# Altium PCB PTx-V1.PcbDoc
Units mil, origin at the board's own origin, x right, y up, seen from the top; angles counter-clockwise.
Board outline 6102.36 x 4488.19 mil, 2 copper layers (Top Layer, Bottom Layer); 94 components, 94 nets, 366 pads, 149 vias.
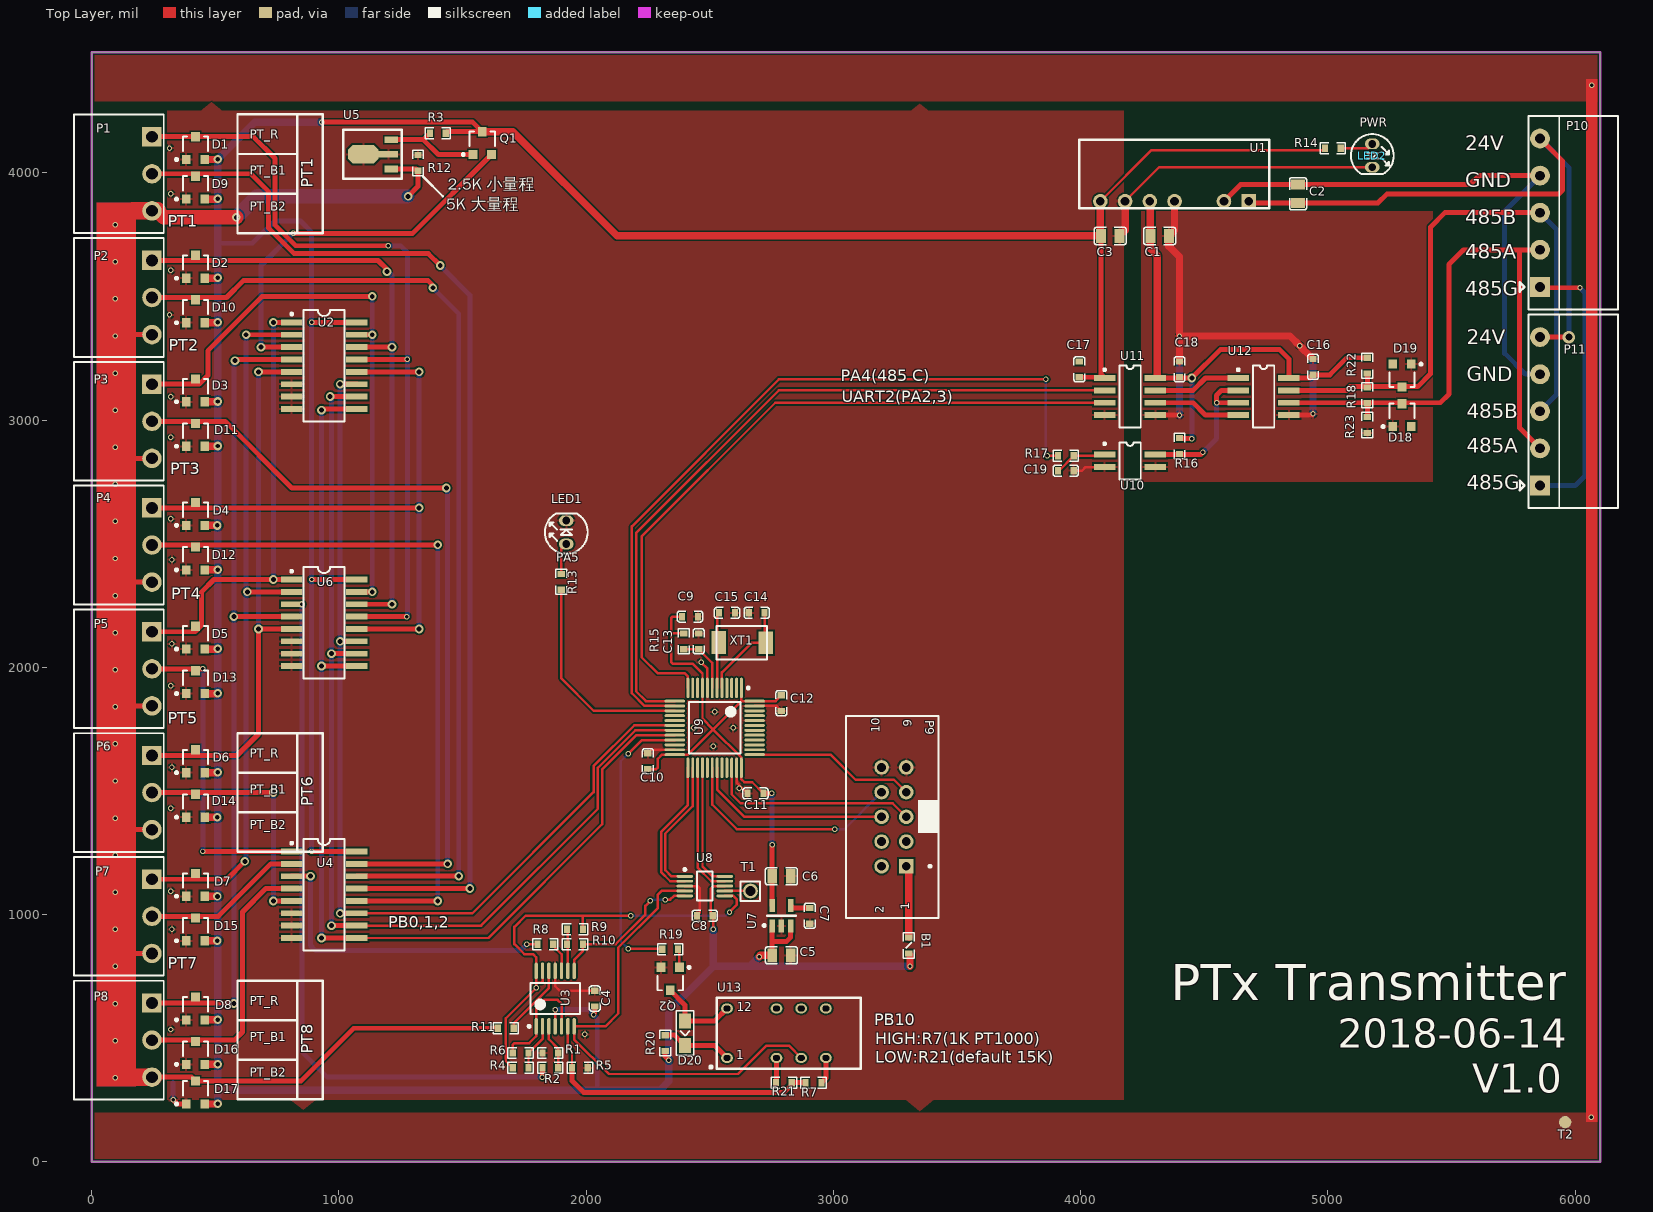
[diagram p0: Top Layer view]
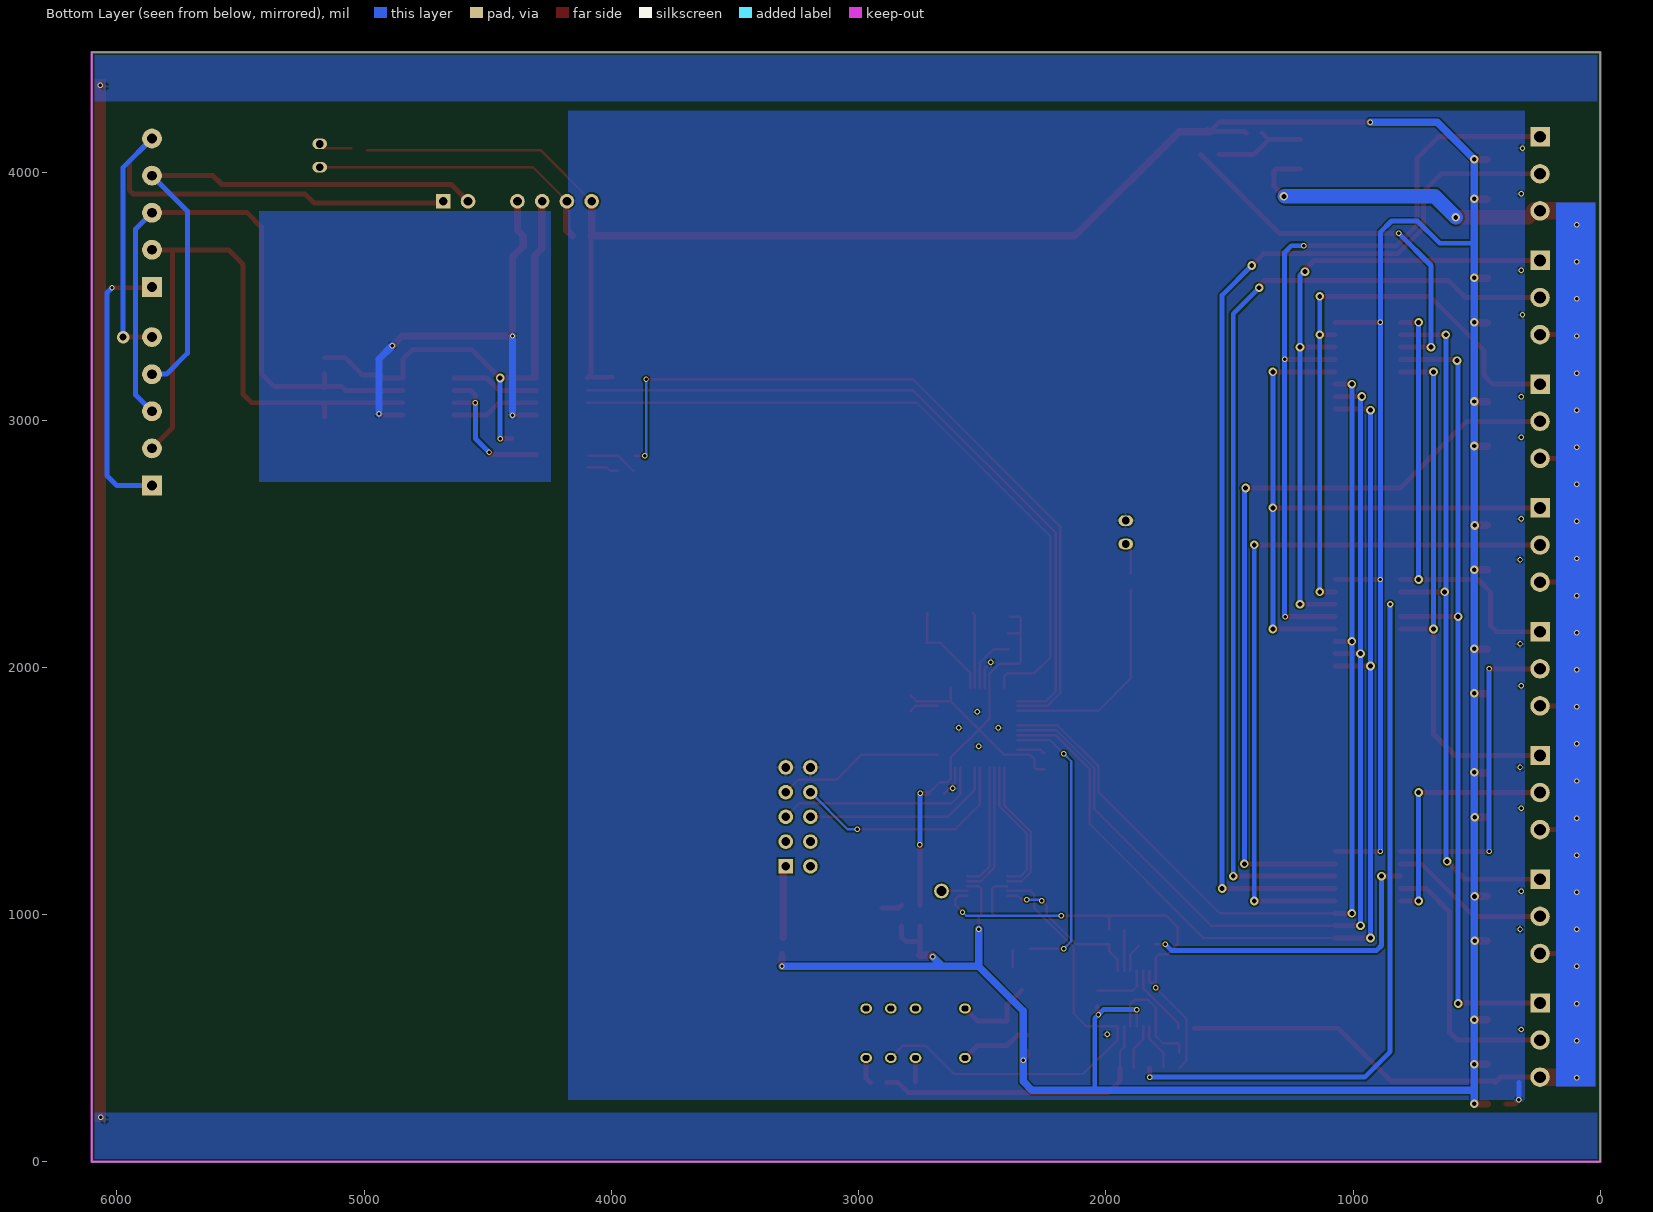
[diagram p1: Bottom Layer view, seen from below]

## Layer stack, top to bottom
Top Layer: signal copper 1.4
Dielectric: dielectric 12.6, FR-4, Dk 4.8
Bottom Layer: signal copper 1.4

## Board outline
0,0 6102.36,0 6102.36,4488.19 0,4488.19

## Design rules (kind name [scope] priority, off if disabled: settings)
Clearance [All] p1: gap=7
ComponentClearance [All] p1: gap=0 collisioncheckmode=3 verticalgap=0 showdistances=FALSE
HoleSize [All] p1: absolutevalues=TRUE maxlimit=1000 minlimit=1 maxpercent=80.000 minpercent=20.000
HoleToHoleClearance [All] p1: gap=7 allowstackedmicrovias=TRUE
MinimumSolderMaskSliver [All] p1: minsoldermaskwidth=0
PolygonConnect [All] p1: connectstyle=Relief reliefconductorwidth=10 reliefentries=4 polygonreliefangle="90 Angle"
RoomDefinition 前端 [InComponentClass('前端')] p1: confinementstyle=ConfineIn formatcopy=TRUE lockcomponents=FALSE outline -3165,-1025 -1165,-1025 -1165,-25 -3165,-25
RoomDefinition mcu [InComponentClass('mcu')] p2: confinementstyle=ConfineIn formatcopy=TRUE lockcomponents=FALSE outline -3165,-1025 -1165,-1025 -1165,-25 -3165,-25
RoutingVias [All] p1: holewidth=14 width=22 viastyle="Through Hole" minholewidth=14 minwidth=22 maxholewidth=280 maxwidth=500
SilkToSilkClearance [All] p1: silktosilkclearance=0
SilkscreenOverComponentPads [All] p1: minsilkscreentomaskgap=0
SolderMaskExpansion [All] p1: expansion=4
TestPointUsage [All] p1: valid=0 allowmultiple=FALSE
Testpoint [All] p1: side=15 testpointundercomponent=TRUE minsize=40 maxsize=100 preferedsize=60 minholesize=0 maxholesize=40 preferedholesize=32 testpointgrid=1 style=1023 order=0-112345678
Width [All] p1: maxlimit=100 minlimit=7 preferedwidth=7
18 further rules are at their usual default settings.

## Classes and differential pairs
component class 前端: C1 C2 C3 C4 D1 D2 D3 D4 D5 D6 D7 D8 D9 D10 D11 D12 D13 D14 D15 D16 D17 D20 P1 P2 P3 P4 P5 P6 P7 P8 P10 P11 Q1 Q2 R1 R2 R3 R4 R5 R6 R7 R8 R9 R10 R11 R12 R19 R20 R21 T2 U1 U2 U3 U4 U5 U6 U13
component class mcu: B1 C5 C6 C7 C8 C9 C10 C11 C12 C13 C14 C15 C16 C17 C18 C19 D4 D5 LED1 LED2 P9 R13 R14 R15 R16 R17 R18 R22 R23 T1 U7 U8 U9 U10 U11 U12 XT1

## Components (designator, comment, footprint, x,y, rotation, side; value= is the part's Value field where it differs from the comment)
B1 "BEAD" 0603L 3305,875 r270 top
C1 "4.7uF/16V" 0805C 4320,3745 r180 top
C2 "2.2uF/50V" 0805C 4880,3915 r90 top
C3 "4.7uF/16V" 0805C 4120,3745 r180 top
C4 "1uF" 0603C 2035,660 r270 top
C5 "1uF" 0805C 2790,835 r180 top
C6 "1uF" 0805C 2790,1155 r180 top
C7 "470P" 0603C 2905,995 r270 top
C8 "104" 0603C 2480,995 r0 top
C9 "104" 0603C 2420,2205 r180 top
C10 "104" 0603C 2250,1620 r270 top
C11 "104" 0603C 2685,1490 r180 top
C12 "104" 0603C 2790,1855 r90 top
C13 "104" 0603C 2455,2105 r90 top
C14 "22P" 0603C 2690,2220 r180 top
C15 "22P" 0603C 2570,2220 r0 top
C16 "104" 0603C 4940,3215 r270 top
C17 "104" 0603C 3995,3205 r90 top
C18 "104" 0603C 4400,3205 r270 top
C19 "104" 0603C 3940,2795 r0 top
D1 "PESD5V0L2BT" SOT23A 420,4100 r0 top
D2 "PESD5V0L2BT" SOT23A 420,3620 r0 top
D3 "PESD5V0L2BT" SOT23A 420,3120 r0 top
D4 "PESD5V0L2BT" SOT23A 420,2620 r0 top
D5 "PESD5V0L2BT" SOT23A 420,2120 r0 top
D6 "PESD5V0L2BT" SOT23A 420,1620 r0 top
D7 "PESD5V0L2BT" SOT23A 420,1120 r0 top
D8 "PESD5V0L2BT" SOT23A 420,620 r0 top
D9 "PESD5V0L2BT" SOT23A 420,3940 r0 top
D10 "PESD5V0L2BT" SOT23A 420,3440 r0 top
D11 "PESD5V0L2BT" SOT23A 420,2940 r0 top
D12 "PESD5V0L2BT" SOT23A 420,2440 r0 top
D13 "PESD5V0L2BT" SOT23A 420,1940 r0 top
D14 "PESD5V0L2BT" SOT23A 420,1440 r0 top
D15 "PESD5V0L2BT" SOT23A 420,940 r0 top
D16 "PESD5V0L2BT" SOT23A 420,440 r0 top
D17 "PESD5V0L2BT" SOT23A 420,280 r0 top
D18 "PESD5V0L2BT" SOT23A 5300,3020 r0 top
D19 "PESD5V0L2BT" SOT23A 5300,3180 r180 top
D20 "D-S" SOD123 2400,520 r270 top
LED1 "LED" LED-3 1920,2545.76 r90 top
LED2 "LED" LED-3 5180,4070 r270 top
P1 "Header 3" KF2DEG-3.81-3 244.09,3996.06 r270 top locked
P2 "Header 3" KF2DEG-3.81-3 244.09,3495.5 r270 top locked
P3 "Header 3" KF2DEG-3.81-3 244.09,2994.94 r270 top locked
P4 "Header 3" KF2DEG-3.81-3 244.09,2494.38 r270 top locked
P5 "Header 3" KF2DEG-3.81-3 244.09,1993.81 r270 top locked
P6 "Header 3" KF2DEG-3.81-3 244.09,1493.25 r270 top locked
P7 "Header 3" KF2DEG-3.81-3 244.09,992.69 r270 top locked
P8 "Header 3" KF2DEG-3.81-3 244.09,492.13 r270 top locked
P9 "Header 5X2" DC2.54-10 3245,1395 r90 top
P10 "Header 5" KF2DEG-3.81-5 5858.27,3838.58 r90 top locked
P11 "Header 5" KF2DEG-3.81-5 5858.27,3035.43 r90 top locked
Q1 "S9014" SOT23A 1580,4120 r0 top
Q2 "S9014" SOT23A 2340,740 r180 top
R1 "10K" 0603R 1855,440 r0 top
R2 "10K" 0603R 1855,380 r180 top
R3 "1K" 0603R 1400,4160 r0 top
R4 "10K" 0603R 1735,380 r180 top
R5 "1K" 0603R 1975,380 r0 top
R6 "10K" 0603R 1735,440 r0 top
R7 "1K" 0603R 2920,320 r0 top
R8 "1K" 0603R 1835,880 r180 top
R9 "1K" 0603R 1955,940 r0 top
R10 "100K" 0603R 1955,880 r180 top
R11 "10K" 0603R 1675,540 r180 top
R12 "2.5K" 0603R 1320,4040 r270 top
R13 "1.5K" 0603R 1900,2345.76 r90 top
R14 "1.5K" 0603R 5020,4100 r0 top
R15 "10K" 0603R 2395,2105 r270 top
R16 "RES" 0603R 4400,2895 r90 top
R17 "RES" 0603R 3940,2855 r180 top
R18 "120R" 0603R 5160,3100 r90 top
R19 "10K" 0603R 2340,860 r0 top
R20 "100R" 0603R 2320,480 r270 top
R21 "15K" 0603R 2800,320 r180 top
R22 "10K" 0603R 5160,3220 r90 top
R23 "10K" 0603R 5160,2980 r90 top
T1 "TP" TESTP 2665,1095 r0 top
T2 "TP" TP1 5960,160 r0 top
U1 "D240505S" D240505S-2W 4680,3885 r180 top
U2 "CD4051" SOP16 940,3220 r270 top
U3 "OPA4330AIPWR" TSSOP14-65 1875,660 r90 top locked
U4 "CD4051" SOP16 940,1080 r270 top
U5 "TL431" SOT-89 1160,4075 r90 top
U6 "CD4051" SOP16 940,2180 r270 top
U7 "MIC5219" SOT23-5 2790,995 r90 top
U8 "ADS1118" TSSOP10 2480,1115 r0 top
U9 "STM32F103" LQFP48 2520,1755 r270 top
U10 "TLP281" SOP4 4200,2835 r270 top
U11 "ADUM3201" SOP8 4200,3095 r270 top
U12 "BL3085B" SOP8 4740,3095 r270 top
U13 "JDQ(G6S-2)" JDQ-G6S-2 2820,520 r0 top
XT1 "8M" 5032 2630,2100 r180 top

## Footprints (in the part's own frame and the unit in brackets; to place one, negate y for a bottom-side part, rotate by r counter-clockwise, add the part's x,y. Pads: shape width x height; smd on the part's side, far side on the other; paste and mask are expansions set on the pad)
0603C [mil]
  rect 25x30 smd: 1(-32,0) 2(32,0)
  silkscreen extent -51,-22 51,22
0603L [mil]
  rect 25x30 smd: 1(-32,0) 2(32,0)
  silkscreen extent -51,-22 51,22
0603R [mil]
  rect 25x30 smd: 1(-32,0) 2(32,0)
  silkscreen extent -51,-22 51,22
0805C [mm]
  rect 1x1.45 smd: 1(-0.95,0) 2(0.95,0)
  silkscreen extent -1.64,-0.86 1.64,0.89
5032 [mm]
  rect 1.5x2.3 smd: 1(-2.438,0.025)
  rect 1.5x2.4 smd: 2(2.388,0)
  silkscreen extent -2.59,-1.7 2.59,1.75
D240505S-2W [mm] "24V转5Vdcdc模块"
  rect 1.5x1.5 hole 0.9: 1(0,0)
  round 1.5 hole 0.9: 2(2.54,0) 4(7.62,0) 5(10.16,0) 6(12.7,0) 7(15.24,0)
  silkscreen extent -2.09,-6.3 17.41,0.7
DC2.54-10 [mm] "Connector; IDC, PCB Transition - 2 Rows, Thru-Hole; 10 Position; Vertical; Pitch 2.54 mm; Body 18.00 x 6.1 x 7.45 mm (LxWxH)"
  rect 1.5x1.5 hole 0.9: 1(-5.08,-1.27)
  round 1.5 hole 0.9: 2(-5.08,1.27) 3(-2.54,-1.27) 4(-2.54,1.27) 5(0,-1.27) 6(0,1.27) 7(2.54,-1.27) 8(2.54,1.27) 9(5.08,-1.27) 10(5.08,1.27)
  silkscreen extent -10.39,-4.57 10.36,4.93
JDQ-G6S-2 [mm] "继电器（G6S-2） 5VDC"
  oval 1.2x1 hole 0.6 slot 0.7 at 0 deg: 1(-6.35,-2.54) 3(-1.27,-2.54) 4(1.27,-2.54) 5(3.81,-2.54) 8(3.81,2.54) 9(1.27,2.54) 10(-1.27,2.54) 12(-6.35,2.54)
  silkscreen extent -8.14,-3.65 7.4,3.65
KF2DEG-3.81-3 [mm]
  rect 2x2 hole 1.2: 1(-3.81,0)
  round 2 hole 1.2: 2(0,0) 3(3.81,0)
  silkscreen extent -6.1,-8 6.1,1.2
KF2DEG-3.81-5 [mil]
  rect 80x80 hole 39.37: 1(-300,0)
  round 80 hole 39.37: 2(-150,0) 3(0,0) 4(150,0) 5(300,0)
  silkscreen extent -391,-315 391,83
LED-3 [mm]
  oval 1.1x1.5 hole 0.8: A(-1.194,0) K(1.206,0)
  silkscreen extent -2.19,-2.2 1.92,2.2
LQFP48 [mm]
  oval 2.1x0.3 smd: 1(-4.1,2.75) 2(-4.1,2.25) 3(-4.1,1.75) 4(-4.1,1.25) 5(-4.1,0.75) 6(-4.1,0.25) 7(-4.1,-0.25) 8(-4.1,-0.75) 9(-4.1,-1.25) 10(-4.1,-1.75) 11(-4.1,-2.25) 12(-4.1,-2.75) 25(4.1,-2.75) 26(4.1,-2.25) 27(4.1,-1.75) 28(4.1,-1.25) 29(4.1,-0.75) 30(4.1,-0.25) 31(4.1,0.25) 32(4.1,0.75) 33(4.1,1.25) 34(4.1,1.75) 35(4.1,2.25) 36(4.1,2.75)
  oval 0.3x2.1 smd: 13(-2.75,-4.1) 14(-2.25,-4.1) 15(-1.75,-4.1) 16(-1.25,-4.1) 17(-0.75,-4.1) 18(-0.25,-4.1) 19(0.25,-4.1) 20(0.75,-4.1) 21(1.25,-4.1) 22(1.75,-4.1) 23(2.25,-4.1) 24(2.75,-4.1) 37(2.75,4.1) 38(2.25,4.1) 39(1.75,4.1) 40(1.25,4.1) 41(0.75,4.1) 42(0.25,4.1) 43(-0.25,4.1) 44(-0.75,4.1) 45(-1.25,4.1) 46(-1.75,4.1) 47(-2.25,4.1) 48(-2.75,4.1)
  silkscreen extent -4.22,-2.65 2.65,3.57
SOD123 [mil]
  rect 60x49.21 smd: A(-50,0) K(50,0)
  silkscreen extent -90,-35 90,35
SOP4 [mm] "Small Outline; 6 Leads; Body Width 4.3 mm; Pitch 1.27 mm"
  rect 0.6x2.2 smd: 1(-0.635,-2.6) 2(0.635,-2.6) 3(0.635,2.6) 4(-0.635,2.6)
  silkscreen extent -1.91,-2.72 1.91,1.1
SOP8 [mm] "Small Outline; 8 Leads; Body Width 4.3 mm; Pitch 1.27 mm"
  rect 0.6x2.2 smd: 1(-1.905,-2.6) 2(-0.635,-2.6) 3(0.635,-2.6) 4(1.905,-2.6) 5(1.905,2.6) 6(0.635,2.6) 7(-0.635,2.6) 8(-1.905,2.6)
  silkscreen extent -3.18,-2.72 3.18,1.1
SOP16 [mm] "Small Outline; 16 Leads; Body Width 5.6 mm; Pitch 1.27 mm"
  rect 0.6x2.2 smd: 1(-4.445,-3.321) 2(-3.175,-3.321) 3(-1.905,-3.321) 4(-0.635,-3.321) 5(0.635,-3.321) 6(1.905,-3.321) 7(3.175,-3.321) 8(4.445,-3.321) 9(4.445,3.371) 10(3.175,3.371) 11(1.905,3.371) 12(0.635,3.371) 13(-0.635,3.371) 14(-1.905,3.371) 15(-3.175,3.371) 16(-4.445,3.371)
  silkscreen extent -5.73,-3.45 5.73,2.1
SOT23-5 [mm] "SOT23, 5-Leads, Body 3.0x2.6mm (max), Pitch 0.95mm, IPC Medium Density"
  rect 1.3x0.55 smd: 1(-1.051,0.95) 2(-1.051,0) 3(-1.051,-0.95) 4(1.051,-0.95) 5(1.051,0.95)
  silkscreen extent -1.12,-1.5 0.05,1.9
SOT23A [mm] "SOT-23; 3 Leads; Body 3.0 x 2.5 mm, inc. leads (LxW max)"
  rect 0.9x0.95 smd: 1(-0.95,-1.175) 2(0.95,-1.175) 3(0,1.175)
  silkscreen extent -2.07,-1.3 1.3,1.18
SOT-89 [mm] "SOT23, 5-Leads, Body 3.0x2.6mm (max), Pitch 0.95mm, IPC Medium Density"
  rect 0.7x1.35 smd: 1(-1.501,-1.321) 3(1.499,-1.321)
  oct 1.9x3.15 smd: 2(-0.001,1.544)
  rect 0.7x1.99 smd: 2(-0.001,-1.026)
  silkscreen extent -2.5,-2.39 2.5,3.61
TESTP [mil]
  round 60 hole 40: 1(0,0)
  silkscreen extent -40,-39 39,39
TP1 [mil]
  round 50 smd: 1(0,0)
TSSOP10 [mm] "TSSOP, 10-Leads, Body 3.0x3.0mm (max), Pitch 0.50mm, IPC Medium Density"
  oval 1.7x0.3 smd: 1(-2.05,1) 2(-2.05,0.5) 3(-2.05,0) 4(-2.05,-0.5) 5(-2.05,-1) 6(2.05,-1) 7(2.05,-0.5) 8(2.05,0) 9(2.05,0.5) 10(2.05,1)
  silkscreen extent -2.17,-1.5 0.8,1.82
TSSOP14-65 [mm] "TSOP, 14-Leads, Body 5.1x4.5mm (max), Pitch 0.65mm, IPC Medium Density"
  oval 1.7x0.35 smd: 1(-2.85,1.95) 2(-2.85,1.3) 3(-2.85,0.65) 4(-2.85,0) 5(-2.85,-0.65) 6(-2.85,-1.3) 7(-2.85,-1.95) 8(2.85,-1.95) 9(2.85,-1.3) 10(2.85,-0.65) 11(2.85,0) 12(2.85,0.65) 13(2.85,1.3) 14(2.85,1.95)
  silkscreen extent -2.97,-2.55 1.6,2.8

## Part data
B1: "磁珠"
C1 C2 C3 C4 C5 C6 C7 C8 C9 C10 C11 C12 C13 C14 C15 C16 C17 C18 C19: library part CAP, "普通小电容"
D1 D2 D3 D4 D5 D6 D7 D8 D9 D10 D11 D12 D13 D14 D15 D16 D17 D18 D19: "schottky diod"
D20: "肖特基二极管"
P1 P2 P3 P4 P5 P6 P7 P8: "Header, 3-Pin"
P9: "Header, 5-Pin, Dual row"
P10 P11: "Header, 5-Pin"
Q1 Q2: library part NPN, "NPN三极管"
R1 R2 R3 R4 R5 R6 R7 R8 R9 R10 R11 R12 R13 R14 R15 R18 R19 R20 R21 R22 R23: library part RES, "普通电阻"
R16 R17: "普通电阻"
T1 T2: "testpoint"
U1: library part D240505S-2W, "24V转双5V隔离DCDC"
U2 U4 U6: "模拟多路复用器"
U3: library part OPA4348, "输出轨到轨，4运放"
U8: "16λ ADC"
U10: "TLP281 光耦"
U12: "BL3085B 15KV防静电485"
U13: "继电器（G6S-2 5VDC）"
XT1: library part XT, "晶振"

## Via types
v1: diameter 22, hole 14, Top Layer to Bottom Layer, 87 vias
v2: diameter 35, hole 20, Top Layer to Bottom Layer, 44 vias
v3: diameter 35, hole 18, Top Layer to Bottom Layer, 16 vias
v4: diameter 50, hole 28, Top Layer to Bottom Layer, 1 vias
v5: diameter 25, hole 15, Top Layer to Bottom Layer, 1 vias

## Nets (pads, with @x,y where several pads share a name; then routed paths per layer and width w, separated by ;. In a path a pad name is that pad's centre, name@x,y a point inside that pad or via, vN(x,y) a via of type N, cw(c..) or ccw(c..) an arc to the next point about the centre after c; other vN are vias at no path point)
1GND: C17.2
2D5V: C1.2 C16.2 C18.2 R16.2 R22.2 U1.5 U11.8 U12.8 | length 2041.5
  Top Layer w20: U11.8 v2(4450,3170) 4565,3285 4805,3285 4842.36,3247.64 U12.8 4927,3170 C16.2 5008,3183 5077,3252 R22.2 ; R16.2@4402,2925 v1(4450,2925)
  Top Layer w30: U1.5@4282.6,3882.4 C1.2 4282.6,3692.4 4310,3665 U11.8@4310,3177.64
  Bottom Layer w20: v1(4450,2925) v2(4450,3170)
2GND: C1.1 C16.1 C18.1 D18.1 D19.1 R23.1 U1.4 U10.3 U11.5 U12.5 | length 2069.2
  Top Layer w20: U11.5 v1(4400,3020) ; U12.5 4935,3020 v1(4940,3025)
  Top Layer w30: U1.4 4380,3767.6 C1.1 4357.4,3702.6 4400,3660 v1(4400,3340) ; C18.1 v1(4400,3340) ; C16.1 v1(4886,3301) 4847,3340 v1(4400,3340)
  Bottom Layer w30: v1(4400,3020) v1(4400,3340) ; v1(4886,3301) 4940,3247 v1(4940,3025)
485A: D18.3 P10.2 P11.2 R18.1 R23.2 U12.6 | length 2473.3
  Top Layer w20: U12.6 5455,3070 5490,3105 5490,3630 5548.58,3688.58 5775,3688.58 ; R23.2 R18.1 ; P11.2 5775,2968.7 5775,3688.58 ; P10.2 5775,3688.58
485B: D19.3 P10.3 P11.3 R18.2 R22.1 U12.7 | length 2575.4
  Top Layer w20: U12.7 5075,3120 5090,3135 R18.2@5160,3135 ; R18.2 R18.2@5160,3135 ; R22.1 R18.2@5160,3135 ; P10.3 5473.58,3838.58 5415,3780 5415,3187 5363,3135 R18.2@5160,3135
  Bottom Layer w20: P11.3 5925,3102.17 5925,3771.85 P10.3
485G: P10.1 P11.1 | length 1129.6
  Top Layer w20: P10.1 5861.85,3535 v1(6020,3535)
  Bottom Layer w20: P11.1 6000.43,2735.43 6040,2775 6040,3515 v1(6020,3535)
ADC0: U3.7 U8.4 U13.4 | length 1959
  Top Layer w10: U8.4 2305.31,1095.32 2290.31,1080.32 2290.31,1026.27 2130,865.96 2130,600 2077.8,547.8 U3.7 1951.77,495.23 2092,355 2615,355 2730,470 2820,470 U13.4
ADC1: R10.1 U3.8 U8.5 | length 636.2
  Top Layer w10: U3.8 1951.77,816.77 1987,852 R10.1 2120,880 2240,1000 2240,1035 v1(2260,1055) ; v1(2320,1060) 2340,1060 2355.63,1075.63 U8.5
  Bottom Layer w10: v1(2260,1055) 2265,1060 v1(2320,1060)
D3V3: C6.2 C9.2 C10.2 C11.1 C12.2 R15.1 U7.5 U9.1 U9.9 U9.24 U9.36 U9.48 | length 2247.7
  Top Layer w10: C10.2 2283,1588 2290,1595 2290,1630 2306.73,1646.73 U9.24 ; 2347,2137 R15.1 ; U9.24@2358.77,1646.92 2411.92,1646.92 2513.96,1748.96 ; C9.2 2350,2205 2345,2200 2345,2020 2350,2015 2430,2015 2470.79,1974.21 U9.9 2470.79,1792.13 2513.96,1748.96 ; U9.1 2628.27,1863.27 ; C11.1 2672,1535 2640,1535 2628.27,1546.73 U9.36 2628.27,1634.65 2513.96,1748.96 ; C12.2 2766.27,1863.27 U9.48 2628.27,1863.27 ; 2513.96,1748.96 2628.27,1863.27
  Top Layer w20: C11.1 v1(2750,1490) ; U7.5 C6.2 v1(2752.6,1282.4)
  Bottom Layer w20: v1(2750,1490) 2752.6,1487.4 v1(2752.6,1282.4)
D5V: B1.2 C3.2 C4.2 C5.2 C8.2 C17.1 D1.2 D2.2 D3.2 D4.2 D5.2 D6.2 D7.2 D8.2 D9.2 D10.2 D11.2 D12.2 D13.2 D14.2 D15.2 D16.2 D17.2 Q1.3 R3.2 R14.1 R20.2 U1.7 U2.16 U3.4 U4.16 U6.16 U7.1 U7.3 U8.8 U11.1 | length 18556.4
  Top Layer w10: U3.4 v1(1875,615) ; C8.2@2505,995 2505,1105 2515,1115 U8.8 ; v1(2515,940) C8.2@2515,992 ; U1.7 4287,4092 R14.1@4988,4092
  Top Layer w20: v1(890,1255) U4.16 ; v1(890,2355) U6.16 ; v1(890,3395) 900,3395 U2.16 ; v1(930,4205) 1541.26,4205 Q1.3 ; R3.2 1438.26,4166.26 Q1.3 ; Q1.3@1588.74,4175 Q1.3 ; v1(2030,595) 2035,600 C4.2 ; R20.2 2320,425 v1(2335,410) ; C5.2 2752.6,890 ; U7.1 2752.6,890 ; U7.3 2827.4,907.4 2810,890 2752.6,890 ; C17.1 U11.1@4094.64,3173 ; C3.2 4082.6,3185.04 U11.1@4094.64,3173 ; U11.1 U11.1@4094.64,3173
  Top Layer w30: D17.2 v3@508.74,233.74 ; D16.2 v3@508.74,393.74 ; D8.2 v3@508.74,573.74 ; D15.2 v3(508.74,893.74) ; D7.2 v2(508.74,1073.74) ; D14.2 v3(508.74,1393.74) ; D6.2 v3@508.74,1573.74 ; D13.2 v3@508.74,1893.74 ; D5.2 v3@510,2073.74 ; D12.2 v3@508.74,2393.74 ; D4.2 v3(508.74,2573.74) ; D11.2 v3@508.74,2893.74 ; D3.2 v3@508.74,3073.74 ; D10.2 v3@508.74,3393.74 ; D2.2 v3@508.74,3573.74 ; D9.2 v3@508.74,3893.74 ; D1.2 v3@508.74,4053.74 ; Q1.3 1703.74,4166.26 2125,3745 C3.2 ; v1(2700,830) 2705,835 C5.2 ; v1(3310,790) B1.2@3310,838 ; C3.2@4080,3747.6 U1.7
  Bottom Layer w20: 510,3715 650,3715 740,3805 845,3805 890,3760 v1(890,3395) v1(890,1255) ; v1(1875,615) 2010,615 v1(2030,595) 2045,580 2045,290
  Bottom Layer w30: v3(510,235) 510,290 ; v1(930,4205) 660,4205 v3(510,4055) v3(510,3895) 510,3715 v3(510,3575) v3(510,3395) v3(510,3075) v3(510,2895) v3(510,2395) v3(510,2075) v3(510,1895) v3(510,1575) v3(510,575) v3(510,395) 510,290 ; v1(2515,940) 2515,790 ; v1(2700,830) 2660,790 ; v1(3310,790) 2660,790 ; 510,290 2045,290 2300,290 2335,325 v1(2335,410) 2335,610 2515,790 ; 2515,790 2660,790
D24V: C2.1 P10.5 P11.5 U1.1 | length 2499.1
  Top Layer w20: U1.1@4687.4,3877.6 C2.1 5202.6,3877.6 5240,3915 5935,3915 5950,3930 5950,4046.85 5918.43,4078.43 P10.5 ; P11.5 v4(5975,3335.43)
  Bottom Layer w20: P10.5 5975,4021.85 v4(5975,3335.43)
GND: C3.1 C4.1 C5.1 C6.1 C7.2 C8.1 C9.1 C10.1 C11.2 C12.1 C13.2 C14.2 C15.2 C19.2 D1.1 D2.1 D3.1 D4.1 D5.1 D6.1 D7.1 D8.1 D9.1 D10.1 D11.1 D12.1 D13.1 D14.1 D15.1 D16.1 D17.1 LED1.K LED2.K P9.9 P9.10 Q2.2 R1.1 R5.2 R12.1 U1.6 U2.6 U2.7 U2.8 U3.11 U4.6 U4.7 U4.8 U5.2 U6.6 U6.7 U6.8 U7.2 U8.3 U9.8 U9.23 U9.35 U9.44 U9.47 U10.2 U11.4 | length 2344.8
  Top Layer w10: U3.11 1875,710 1893,692 C4.1 ; C10.1 2264.42,1666.42 U9.23 ; U8.3 2450,1115 2460,1105 2460,1007 C8.1 ; v1(2465,2020) 2490.47,1994.53 U9.8 ; U9.35 2608.58,1534.42 C11.2 ; U9.47 2769.42,1843.58 C12.1 ; C19.2 4005,2795 4020,2810 U10.2 ; U1.6 4317.51,4022.51 LED2.K
  Top Layer w20: v1(330,250) 346.26,233.74 D17.1
  Top Layer w30: C3.1 4180,3767.6 U1.6
  Bottom Layer w20: v1(330,250) 330,320
  other v1: 1995,515 320,535 325,940 320,1095 320,1430 2620,1510 325,1595 2515,1680 2435,1755 2595,1755 2520,1820 320,1925 325,2095 325,2435 320,2600 320,2930 320,3095 315,3425 320,3605 320,3915 315,4100
GROUND: T2.1
  other v1: 6065,180 6067.36,4355
MUX0: U2.11 U4.11 U6.11 U9.18 | length 4005.3
  Top Layer w10: U4.11 1540,1005 2030,1495 2030,1600 2194.84,1764.84 U9.18
  Top Layer w20: v2(1005,1005) U4.11 ; v2(1005,2105) U6.11 ; v2(1005,3145) U2.11
  Bottom Layer w20: v2(1005,1005) v2(1005,2105) v2(1005,3145)
MUX1: U2.10 U4.10 U6.10 U9.19 | length 4165.6
  Top Layer w10: U4.10 1575,955 2047,1427 2047,1592.96 2199.2,1745.16 U9.19
  Top Layer w20: v2(965,3095) U2.10 ; v2(970,955) U4.10 ; v2(970,2055) U6.10
  Bottom Layer w20: v2(965,3095) 970,3090 v2(970,2055) v2(970,955)
MUX2: U2.9 U4.9 U6.9 U9.20 | length 4321
  Top Layer w10: U4.9 1605,905 2065,1365 2065,1586.92 2203.56,1725.47 U9.20
  Top Layer w20: v2(930,905) U4.9 ; v2(930,2005) U6.9 ; v2(930,3040) 935,3045 U2.9
  Bottom Layer w20: v2(930,905) v2(930,3040)
NetC7_1: C7.1 U7.4 | length 81.5
  Top Layer w20: U7.4 2836.77,1027 C7.1
NetC14_1: C14.1 U9.5 XT1.1 | length 411.7
  Top Layer w10: U9.5 2549.53,1979.53 2669,2099 XT1.1 2722,2103 C14.1
NetC15_1: C15.1 U9.6 XT1.2 | length 307
  Top Layer w10: U9.6 2529.84,2211.84 C15.1
NetC19_1: C19.1 R17.1 U10.1 | length 205.5
  Top Layer w10: C19.1@3912,2795 R17.1 U10.1@4092.64,2855
NetD20_A: D20.A Q2.3 U13.12 | length 339.3
  Top Layer w20: Q2.3 2400,633.74 D20.A 2520,570 U13.12
NetD20_K: D20.K R20.1 U13.1 | length 288.1
  Top Layer w20: R20.1 2358,512 D20.K 2520,470 U13.1
NetLED1_A: LED1.A R13.2 | length 129.3
  Top Layer w10: R13.2 1900,2478.76 LED1.A
NetLED2_A: LED2.A R14.2 | length 135
  Top Layer w10: R14.2 5163,4100 LED2.A
NetQ1_B: Q1.1 R3.1 U5.3 | length 392.3
  Top Layer w20: U5.3 1342,4134 ; R3.1 1342,4134 ; Q1.1 1402.26,4073.74 1342,4134
NetQ2_B: Q2.1 R19.2 | length 68.3
  Top Layer w10: Q2.1 R19.2@2377.4,854.6
NetR1_2: R1.2 R2.1 U3.3 | length 183.4
  Top Layer w10: U3.3 1849.41,495.59 1887,458 R1.2 R2.1
NetR4_1: R4.1 R6.2 U3.2 | length 191.3
  Top Layer w10: R4.1 R6.2 1823.82,496.82 U3.2
NetR6_1: R6.1 U3.1 U3.5 | length 471.4
  Top Layer w10: R6.1 1703,473 1710,480 1770,480 1798.23,508.23 U3.1 1798.23,623.23 1830,655 1885,655 1900.59,639.41 U3.5
NetR7_2: R7.2 U13.5 | length 107.5
  Top Layer w20: R7.2 2970,338 U13.5
NetR8_1: R8.1 U3.10 | length 114.7
  Top Layer w10: R8.1@1867,873 1900.59,839.41 U3.10
NetR9_1: R9.1 R10.2 U3.9 | length 164.6
  Top Layer w10: U3.9 R9.1@1926.18,936.82
NetR11_1: R11.1 U3.12 | length 291.2
  Top Layer w10: R11.1 1707,560 1849.41,702.41 U3.12
NetR16_1: R16.1 U10.4 U12.2 U12.3 | length 633.1
  Top Layer w20: U10.4 4485,2860 v1(4495,2870) ; U12.3 v1(4550,3070) 4550,3100 4570,3120 U12.2
  Bottom Layer w20: v1(4495,2870) 4550,2925 v1(4550,3070)
NetR21_2: R21.2 U13.3 | length 98
  Top Layer w20: R21.2@2770,322 U13.3
NetT1_1: T1.1 U8.7 | length 104.4
  Top Layer w10: U8.7 2664.69,1095.32 T1.1
NetU11_6: U11.6 U12.4 | length 356
  Top Layer w20: U11.6 4455,3070 4505,3020 U12.4
NetU11_7: U11.7 U12.1 | length 356
  Top Layer w20: U11.7 4455,3120 4505,3170 4565,3170 U12.1
PA0: U9.10
PA1: U9.11
PA2: U9.12 U11.3 | length 2852.3
  Top Layer w10: U9.12 2411.73,1963.27 2400,1975 2290,1975 2225,2040 2225,2528.49 2224.25,2529.25 2765,3070 U11.3
PA3: U9.13 U11.2 | length 2947.7
  Top Layer w10: U9.13 2241.73,1863.27 2202,1903 2202,2542.96 2779.04,3120 U11.2
PA4: R17.2 U9.14 | length 3141.4
  Top Layer w10: U9.14 2236.42,1843.58 2185,1895 2185,2570 2780,3165 v1(3860,3165) ; v1@3870,2855 R17.2
  Bottom Layer w10: v1(3860,3165) 3860,2860 v1(3865,2855)
PA5: R13.1 U9.15 | length 871.6
  Top Layer w10: R13.1 1900,1955 2031.1,1823.9 U9.15
PA6: U9.16
PA7: U9.17
PA8: U9.29
PA9: P9.8 U9.30 | length 937.1
  Top Layer w10: U9.30 2510.16,1444.84 2610,1345 v1(3005,1345)
  Bottom Layer w10: v1(3005,1345) 3045,1345 P9.8
PA10: P9.6 U9.31 | length 799.2
  Top Layer w10: U9.31 2529.84,1505.16 2640,1395 P9.6
PA11: U9.32
PA12: U9.33
PA13: P9.5 U9.34 | length 851.3
  Top Layer w10: U9.34 2588.9,1486.1 2625,1450 3240,1450 P9.5
PA14: P9.7 U9.37 | length 676.4
  Top Layer w10: U9.37 2988.27,1646.73 3090,1545 3245,1545 P9.7
PA15: U9.38
PB3: U9.39
PB4: U9.40
PB8: U9.45
PB9: U9.46
PB10: R19.1 U9.21 | length 1160.5
  Top Layer w10: v1(2170,862) R19.1@2306,862 ; v1(2170,1650) 2225.79,1705.79 U9.21
  Bottom Layer w10: v1(2170,862) 2140,892 2140,1620 v1(2170,1650)
PB11: U9.22
PB12: U8.2 U9.25 | length 578.4
  Top Layer w10: U8.2 2340.31,1134.69 2303,1172 2303,1334.21 2411.73,1442.94 U9.25
PB13: U8.1 U9.26 | length 549.6
  Top Layer w10: U8.1 2345.63,1154.37 2320,1180 2320,1327.17 2431.42,1438.58 U9.26
PB14: U8.9 U9.27 | length 536.2
  Top Layer w10: U9.27 2451.1,1189.86 2506.27,1134.69 U8.9
PB15: U8.10 U9.28 | length 505.8
  Top Layer w10: U9.28 2470.79,1194.21 2510.63,1154.37 U8.10
PC13: U9.2
PC14: U9.3
PC15: U9.4
PGND: C2.2 P10.4 P11.4 U1.2 | length 2277.4
  Top Layer w20: U1.2 4647.4,3952.4 C2.2 5575.24,3952.4 5611.42,3988.58 P10.4
  Bottom Layer w20: P11.4 5799.57,3185.43 5715,3270 5715,3845.31 P10.4
PT0_B1: D9.3 P1.2 U4.13 | length 4427.2
  Top Layer w20: P1.2@250,3996.06 643.94,3996.06 715,3925 715,3777.22 819.22,3673 1362,3673 v2(1410,3625) ; U4.13 v2(1530,1105)
  Bottom Layer w20: v2(1410,3625) 1530,3505 v2(1530,1105)
PT0_R: D1.3 P1.1 U2.13 U6.13 | length 3258.5
  Top Layer w20: P1.1@250,4146.06 653.94,4146.06 742,4058 742,3788.4 825.4,3705 v1(1200,3705) ; U6.13 v1(1275,2205) ; U2.13 v1(1277.13,3245)
  Bottom Layer w20: v1(1200,3705) 1250,3705 1277.13,3677.87 v1@1277.13,2205
PT1_B1: D10.3 P2.2 U4.14 | length 4012.8
  Top Layer w20: P2.2@250,3495.5 545.5,3495.5 615,3565 1360,3565 1380,3545 v2(1380,3535) ; U4.14 v2(1485,1155)
  Bottom Layer w20: v2(1380,3535) 1485,3430 v2(1485,1155)
PT1_R: D2.3 P2.1 U2.14 U6.14 | length 2609.9
  Top Layer w20: P2.1@250,3645.5 1158.47,3645.5 1195,3608.98 v2(1195,3600) ; U6.14 v2(1215,2255) ; U2.14 v2(1215,3295)
  Bottom Layer w20: v2(1195,3600) 1200,3600 1215,3585 v2(1215,2255)
PT2_B1: D11.3 P3.2 U4.15 | length 3186.2
  Top Layer w20: P3.2@250,2994.94 540.06,2994.94 810,2725 v2(1435,2725) ; U4.15 v2(1440,1205)
  Bottom Layer w20: v2(1435,2725) 1440,2720 v2(1440,1205)
PT2_R: D3.3 P3.1 U2.15 U6.15 | length 2410.2
  Top Layer w20: P3.1@250,3144.94 434.94,3144.94 470,3180 470,3280 690,3500 v2(1135,3500) ; U6.15 v2(1135,2305) ; U2.15 v2(1135,3345)
  Bottom Layer w20: v2(1135,2305) v2(1135,3345) v2(1135,3500)
PT3_B1: D12.3 P4.2 U4.12 | length 2917.5
  Top Layer w20: P4.2@250,2494.38 1399.38,2494.38 v2(1400,2495) ; U4.12 v2(1400,1055)
  Bottom Layer w20: v2(1400,1055) v2(1400,2495)
PT3_R: D4.3 P4.1 U2.12 U6.12 | length 2619.8
  Top Layer w20: P4.1@250,2644.38 1324.38,2644.38 v2(1325,2645) ; U6.12 v2(1325,2155) ; U2.12 v2(1325,3195)
  Bottom Layer w20: v2(1325,2155) v2(1325,2645) v2(1325,3195)
PT4_B1: D13.3 P5.2 U4.1 | length 1299.8
  Top Layer w20: P5.2@250,1993.81 448.81,1993.81 v1(450,1995) ; v1(450,1255) U4.1
  Bottom Layer w20: v1(450,1255) v1(450,1995)
PT4_R: D5.3 P5.1 U2.1 U6.1 | length 1840.1
  Top Layer w20: P5.1@250,2143.81 418.81,2143.81 445,2170 445,2305 495,2355 555,2355 U6.1 ; v2(735,3395) U2.1
  Bottom Layer w20: v2(735,2355) v2(735,3395)
PT5_B1: D14.3 P6.2 U4.5 | length 997.5
  Top Layer w20: P6.2@250,1493.25 v2(735,1493.25) ; v2(735,1055) U4.5
  Bottom Layer w20: v2(735,1055) v2(735,1493.25)
PT5_R: D6.3 P6.1 U2.5 U6.5 | length 2194.5
  Top Layer w20: P6.1@250,1643.25 588.25,1643.25 675,1730 v2(675,2155) U6.5 ; v2(675,3195) U2.5
  Bottom Layer w20: v2(675,2155) v2(675,3195)
PT6_B1: D15.3 P7.2 U4.2 | length 647.2
  Top Layer w20: P7.2@250,992.69 512.69,992.69 725,1205 U4.2
PT6_R: D7.3 P7.1 U2.2 U6.2 | length 2895.6
  Top Layer w20: P7.1@250,1142.69 547.69,1142.69 v2(620,1215) ; v2(625,3345) U2.2 ; v2(630,2305) U6.2
  Bottom Layer w20: v2(620,1215) 625,1220 v2(625,3345)
PT7_B1: D16.3 P8.2 U4.4 | length 1097.2
  Top Layer w20: P8.2@250,492.13 577.13,492.13 610,525 610,1010 705,1105 U4.4
PT7_R: D8.3 P8.1 U2.4 U6.4 | length 3393.6
  Top Layer w20: P8.1@250,642.13 572.87,642.13 v2(575,640) ; v2(575,2205) U6.4 ; v2(580,3240) 585,3245 U2.4
  Bottom Layer w20: v2(575,640) 575,3235 v2(580,3240)
PTX_B1: R8.2 U4.3 | length 1292.4
  Top Layer w10: v1(1760,880) R8.2
  Top Layer w20: U4.3 v2(885,1155)
  Bottom Layer w20: v2(885,1155) 885,875 905,855 1735,855 v1(1760,880)
PTX_B2: D17.3 P1.3 P2.3 P3.3 P4.3 P5.3 P6.3 P7.3 P8.3 R11.2 R12.2 U5.1 | length 7256.4
  Top Layer w20: 130.06,2844.94 P3.3@250,2844.94 ; 130.62,2344.38 P4.3@250,2344.38 ; 131.19,1843.81 P5.3@250,1843.81 ; 131.75,1343.25 P6.3@250,1343.25 ; 132.31,842.69 P7.3@250,842.69 ; 134.5,3345.5 185,3345.5 P2.3@250,3345.5 ; P8.3@250,342.13 404.13,342.13 D17.3 ; D17.3@426.26,320 D17.3 ; U5.1 1312.11,4015.89 R12.2 1320,3945 v2(1280,3905) ; R11.2 1060,540 846.26,326.26 D17.3
  Top Layer w60: P1.3@266.06,3846.06 292.13,3820 v2(585,3820)
  Top Layer w70: P8.3@250,342.13 137.87,342.13 100,380 100,3780 166.06,3846.06 250,3846.06 P1.3@266.06,3846.06
  Bottom Layer w20: v2@1275,3905 v2(1280,3905)
  Bottom Layer w60: v2(585,3820) 607.5,3842.5 670,3905 v2@1275,3905
  other v1: 95,340 95,490 95,640 95,790 95,940 95,1090 95,1240 95,1390 95,1540 95,1690 95,1840 95,1990 95,2140 95,2290 95,2440 95,2590 95,2740 95,2890 95,3040 95,3190 95,3340 95,3490 95,3640 95,3790
PTX_R: R2.2 U6.3 | length 2875.7
  Top Layer w20: v1(1823,342) R2.2
  Bottom Layer w20: v5(850,2255) 850,445 953,342 1415,342 ; 1403,342 1415,342 ; v1(1823,342) 1415,342
PTX_RSOURCE: Q1.2 U2.3 | length 1572.5
  Top Layer w20: v2(685,3295) U2.3 ; v1(815,3755) 1298.66,3755 Q1.2
  Bottom Layer w20: v2(685,3295) 685,3625 v1(815,3755)
RATIO_A: R5.1 R7.1 R21.1 U3.6 | length 1208.8
  Top Layer w10: U3.6 1926.18,463.82 1943,447 R5.1
  Top Layer w20: R5.1 1943,326.99 1989.99,280 2800,280 2840,320 R7.1
RST: C13.1 R15.2 U9.7 | length 239.4
  Top Layer w10: R15.2 C13.1 2510.16,2017.84 U9.7
TRST: P9.3
TSWDO: P9.4
VCC_BUS: B1.1 P9.1 | length 292.1
  Top Layer w30: P9.1 3305,1185 B1.1
VREF: R4.2 R9.2 U3.13 U3.14 U8.6 | length 1821.9
  Top Layer w10: R4.2 1675,408 1675,580 v1(1798.23,703.23) 1798.23,725 ; U3.13 1823.82,728.82 1820,725 1798.23,725 ; R9.2 1987,993 ; v1@2175,995 1755,995 1710,950 1710,880 1750,840 1785,840 1798.23,826.77 U3.14 1798.23,725 ; U8.6 2561.34,1075 2596.02,1075 2610,1061.02 2610,1040 v1(2580,1010)
  Bottom Layer w10: v1(2180,995) 2565,995 v1(2580,1010)
pads on no net: D18.2 D19.2 P9.2 U9.41 U9.42 U9.43 U13.8 U13.9 U13.10

## Polygon pours and split planes (outlines as drawn)
GND on Top Layer "Top Layer-No Net" (solid, pour order 1001): 4175,4250 4175,250 305,250 305,4250
2GND on Top Layer "Top Layer-No Net" (solid): 5425,3845 5425,2750 4245,2750 4245,3845
GND on Top Layer "Top Layer-No Net" (solid, pour order 1007): 3350,205 3425,265 3275,265
GND on Top Layer "Top Layer-No Net" (solid, pour order 1006): 855,210 930,270 780,270
GND on Top Layer "Top Layer-No Net" (solid, pour order 1005): 485,4285 410,4225 560,4225
GND on Top Layer "Top Layer-No Net" (solid, pour order 1004): 3350,4280 3275,4220 3425,4220
GROUND on Top Layer "Top Layer-No Net" (solid, pour order 1001): 0,198.19 0,0 6102.36,0 6102.36,198.19
GROUND on Top Layer "Top Layer-No Net" (solid, pour order 1000): 0,4488.19 0,4290 6102.36,4290 6102.36,4488.19
2GND on Bottom Layer "Top Layer-No Net" (solid, pour order 1011): 4245,3845 4245,2750 5425,2750 5425,3845
GROUND on Bottom Layer "Top Layer-No Net" (solid, pour order 1009): 6102.36,198.19 6102.36,0 0,0 0,198.19
GROUND on Bottom Layer "Top Layer-No Net" (solid, pour order 1008): 6102.36,4488.19 6102.36,4290 0,4290 0,4488.19
GND on Bottom Layer "Top Layer-No Net" (solid, pour order 1001): 4175,4250 4175,250 305,250 305,4250
no net on Top Solder "Top Layer-No Net" (solid): 855,210 930,270 780,270
no net on Top Solder "Top Layer-No Net" (solid): 3350,205 3425,265 3275,265
no net on Top Solder "Top Layer-No Net" (solid): 485,4285 410,4225 560,4225
GND on Top Solder "Top Layer-No Net" (solid): 3350,4280 3275,4220 3425,4220

## Keep-outs
Keep-Out Layer:
  the board outline again, w10

## Other copper
Top Layer:
  rectangle net PTX_B2: 20,305 180,3880
  rectangle net GROUND: 6045,160 6090,4380
Bottom Layer:
  rectangle net PTX_B2: 20,305 180,3880

## Silkscreen, mask and mechanical layers (free items; w line width, h text height)
Top Overlay:
  lines w10: 590,412.13 831.06,412.13 ; 590,572.13 826.06,572.13 ; 590,1413.25 831.06,1413.25 ; 590,1573.25 826.06,1573.25 ; 590,3916.06 831.06,3916.06 ; 590,4076.06 826.06,4076.06 ; 831.06,253.19 831.06,732.13 ; 831.06,1254.31 831.06,1733.25 ; 831.06,3757.13 831.06,4236.06 ; 1342,3983 1420,3905 ; 831.06,732.13 933.94,732.13 933.94,252.13 831.06,252.13 590,252.13 590,732.13 831.06,732.13 ; 831.06,1733.25 933.94,1733.25 933.94,1253.25 831.06,1253.25 590,1253.25 590,1733.25 831.06,1733.25 ; 831.06,4236.06 933.94,4236.06 933.94,3756.06 831.06,3756.06 590,3756.06 590,4236.06 831.06,4236.06
  text "PWR" at 5130,4175 h60
  text "PT_R" at 640,4125 h60
  text "24V" at 5556.69,4071.85 h100
  text "PT_B1" at 640,3980 h60
  text "PT1" at 910,3940 h80 r90
  text "GND" at 5556.69,3921.85 h100
  text "2.5K 小量程" at 1440,3915 h80
  text "PT_B2" at 640,3835 h60
  text "5K 大量程" at 1435,3835 h80
  text "485B" at 5556.69,3771.85 h100
  text "PT1" at 307.19,3765 h80
  text "485A" at 5556.69,3631.85 h100
  text "485G" at 5556.69,3481.85 h100
  text "24V" at 5561.69,3286.85 h100
  text "PT2" at 312.19,3265 h80
  text "PA4(485 C)" at 3030,3140 h80
  text "GND" at 5561.69,3136.85 h100
  text "UART2(PA2,3)" at 3035,3055 h80
  text "485B" at 5561.69,2986.85 h100
  text "485A" at 5561.69,2846.85 h100
  text "PT3" at 317.19,2765 h80
  text "485G" at 5561.69,2696.85 h100
  text "PA5" at 1880,2415 h60
  text "PT4" at 322.19,2260 h80
  text "PT5" at 307.19,1755 h80
  text "PT_R" at 640,1622.19 h60
  text "PT_B1" at 640,1477.19 h60
  text "PT6" at 910,1437.19 h80 r90
  text "PT_B2" at 640,1332.19 h60
  text "PB0,1,2" at 1200,930 h80
  text "PT7" at 307.19,765 h80
  text "PT_R" at 640,621.06 h60
  text "PTx Transmitter" at 4365,605 h250
  text "PB10" at 3165,535 h80
  text "PT_B1" at 640,476.06 h60
  text "HIGH:R7(1K PT1000)" at 3170,460 h80
  text "PT8" at 910,436.06 h80 r90
  text "2018-06-14" at 5040.74,422.34 h200
  text "LOW:R21(default 15K)" at 3170,385 h80
  text "PT_B2" at 640,331.06 h60
  text "V1.0" at 5583.82,240 h200
Top Solder:
  rectangle: 0,0 6102.36,198.19
  rectangle: 0,4290 6102.36,4488.19
Bottom Solder:
  rectangle: 0,0 6102.36,198.19
  rectangle: 0,4290 6102.36,4488.19

## Dimensions
-70.87,4236.06 to 0,4488.19 on Top Overlay
-70.87,300 to 0,0 on Top Overlay
0,0 to 0,4488.19 on Top Overlay
6173.23,4229.33 to 6102.36,4488.19 on Top Overlay
5858.27,3838.58 to 6102.36,4488.19 on Top Overlay
5811.02,4229.33 to 6102.36,4488.19 on Top Overlay

## Text inside footprints (layer, text, board x,y; h text height)
P9: Top Overlay "9" at 3330,1760 h59.06 r90; Top Overlay "10" at 3200,1735 h59.06 r90; Top Overlay "1" at 3320,1020 h59.06 r90; Top Overlay "2" at 3215,1005 h59.06 r90
U13: Top Overlay "1" at 2607,403 h60; Top Overlay "12" at 2610,596 h60